# Altium PCB RFM232_V08_USB.PcbDoc
Units mm, origin at the board's own origin, x right, y up, seen from the top; angles counter-clockwise.
Board outline 90 x 32.1 mm, 2 copper layers (Top Layer, Bottom Layer), stack 1.57 mm thick; 69 components, 58 nets, 262 pads, 153 vias.
Unrouted connection lines stored in the file: 55.
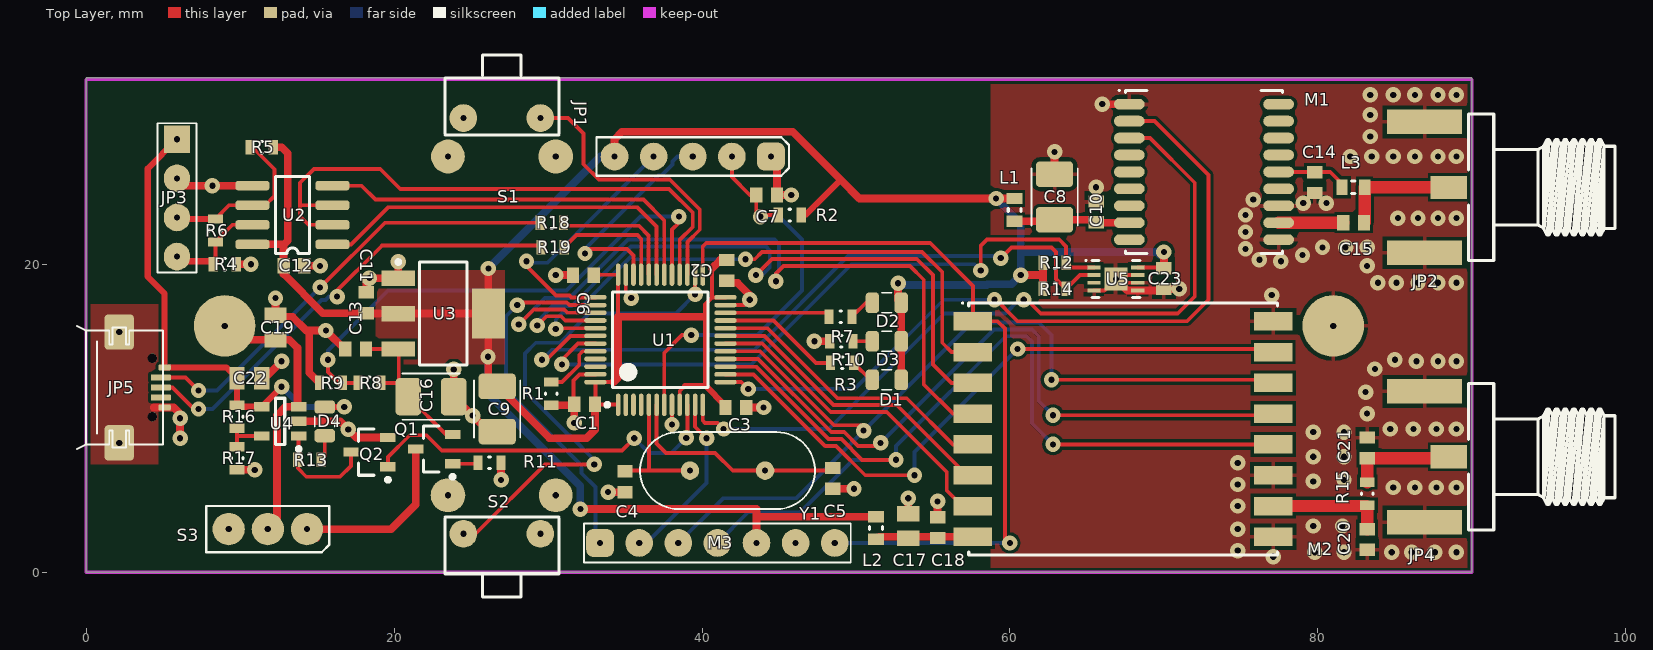
[diagram p0: Top Layer view]
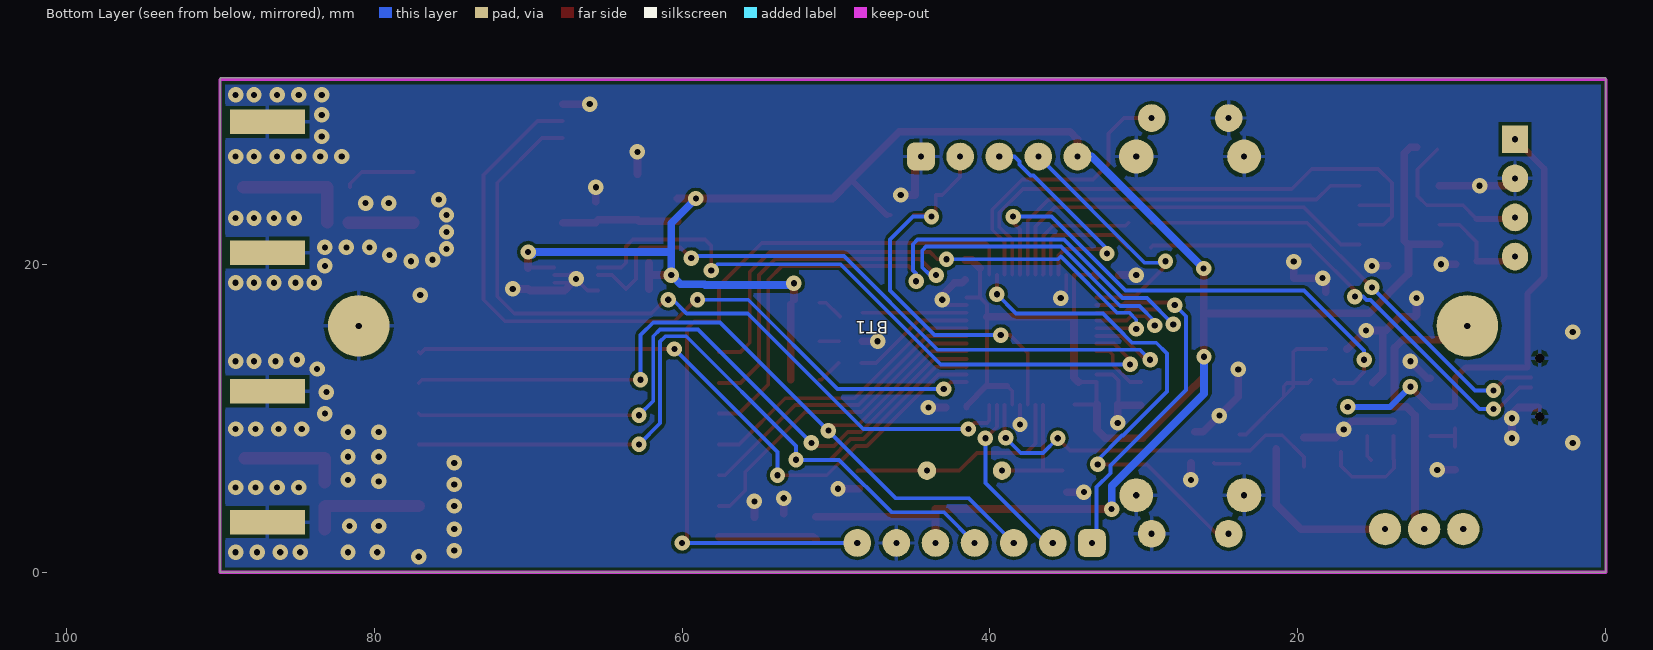
[diagram p1: Bottom Layer view, seen from below]

## Layer stack, top to bottom
Top Solder: solder mask 0.01, Solder Resist, Dk 3.5
Top Layer: signal copper 0.035
Dielectric 1: dielectric 1.5, FR-4, Dk 4.6
Bottom Layer: signal copper 0.035
Bottom Solder: solder mask 0.01, Solder Resist, Dk 3.5

## Board outline
0,0 0,32.1 90,32.1 90,0

## Design rules (kind name [scope] priority, off if disabled: settings)
Clearance Clearance_1 [InNamedPolygon('GND_T_RF') vs InNet('NetC13_2')] p1: gap=0.3 ignorepadtopadclearanceinfootprint=FALSE
Clearance [All] p2: gap=0.2 ignorepadtopadclearanceinfootprint=FALSE
ComponentClearance ComponentClearance_3 [InComponent('BT1') vs InComponent('Y2')] p1: gap=0 collisioncheckmode=3 verticalgap=0 showdistances=FALSE
ComponentClearance ComponentClearance_2 [InComponent('BT1') vs InComponent('S2')] p2: gap=0 collisioncheckmode=3 verticalgap=0 showdistances=FALSE
ComponentClearance ComponentClearance_1 [InComponent('S1') vs InComponent('BT1')] p3: gap=0 collisioncheckmode=3 verticalgap=0 showdistances=FALSE
ComponentClearance [All] p4: gap=0.15 collisioncheckmode=3 verticalgap=0.15 showdistances=FALSE
HoleSize [All] p1: absolutevalues=TRUE maxlimit=5 minlimit=0.025 maxpercent=80.000 minpercent=20.000
MinimumSolderMaskSliver [All] p1: minsoldermaskwidth=0
PolygonConnect PolygonConnect_6 [InComponent('JP5') vs IsNamedPolygon('GND_USB')] p1: connectstyle=Direct reliefconductorwidth=0.254 reliefentries=4 polygonreliefangle="90 Angle" airgapwidth=0.254
PolygonConnect PolygonConnect_5 [All vs IsNamedPolygon('VCC')] p2: connectstyle=Direct reliefconductorwidth=0.254 reliefentries=4 polygonreliefangle="90 Angle" airgapwidth=0.254
PolygonConnect PolygonConnect_4 [IsVia vs IsNamedPolygon('GND_RF')] p3: connectstyle=Direct reliefconductorwidth=0.254 reliefentries=4 polygonreliefangle="90 Angle" airgapwidth=0.254
PolygonConnect PolygonConnect_3 [IsVia vs IsNamedPolygon('GND-B')] p4: connectstyle=Direct reliefconductorwidth=0.254 reliefentries=4 polygonreliefangle="90 Angle" airgapwidth=0.254
PolygonConnect PolygonConnect_2 [InComponent('U2') vs IsNamedPolygon('3V3')] p5: connectstyle=Direct reliefconductorwidth=0.254 reliefentries=4 polygonreliefangle="90 Angle" airgapwidth=0.254
PolygonConnect PolygonConnect_1 [IsVia vs IsNamedPolygon('GND_T_RF') Or  IsNamedPolygon('GND_B1')] p6: connectstyle=Direct reliefconductorwidth=0.254 reliefentries=4 polygonreliefangle="90 Angle" airgapwidth=0.254
PolygonConnect [All] p7: connectstyle=Relief reliefconductorwidth=0.254 reliefentries=4 polygonreliefangle="90 Angle" airgapwidth=0.254
RoutingVias [All] p1: holewidth=0.711 width=1.27 viastyle="Through Hole" minholewidth=0.711 minwidth=1.27 maxholewidth=0.711 maxwidth=1.27
SilkToSilkClearance [All] p1: silktosilkclearance=0.02
SilkToSolderMaskClearance [IsPad] p1: minsilkscreentomaskgap=0.02 clearancetoexposedcopper=TRUE
SolderMaskExpansion [All] p1: expansion=0.102
Width [All] p1: maxlimit=3 minlimit=0.2 preferedwidth=0.25
25 further rules are at their usual default settings.

## Components (designator, comment, footprint, x,y, rotation, side; value= is the part's Value field where it differs from the comment)
BT1 "Battery" 18650 45,16 r0 bottom locked
C1 "100n" C-0603 32.375,10.9 r180 top
C2 "100n" C-0603 41.6,19.6 r270 top
C3 "100n" C-0603 42.2,10.7 r0 top
C4 "22p" C-0603 35,5.875 r90 top
C5 "22p" C-0603 48.5,6.1 r90 top
C6 "100n" C-0603 32.3,19.3 r180 top
C7 "nc" C-0603 44.2,24.5 r0 top
C8 "CAPP" C-TANTAL-B 62.9,24.375 r90 top
C9 "CAPP" C-TANTAL-B 26.7,10.6 r270 top
C10 "100n" C-0603 65.6,23.4 r90 top
C11 "100n" C-0603 18.2,17.5 r90 top
C12 "100n" C-0603 13.5,19.9 r0 top
C13 "100n" C-0603 17.5,14.5 r180 top
C14 "nc" C-0603 79.8,25.3 r90 top
C15 "27p" C-0603 82.325,22.7 r0 top
C16 "CAPP" C-TANTAL-B 22.4,11.4 r0 top
C17 "4u7" C-0805 53.4,3 r90 top
C18 "100n" C-0603 55.3,2.9 r90 top
C19 "4u7" C-0805 12.3,15.9 r90 top
C20 "nc" C-0603 83.2,2.125 r270 top locked
C21 "nc" C-0603 83.2,8.075 r90 top locked
C22 "4u7" C-0805 10.6,12.6 r0 top
C23 "100n" C-0603 70,19.075 r270 top
D1 "GREEN" LED_0805 52,12.5 r0 top locked
D2 "RED" LED_0805 52,17.5 r0 top locked
D3 "GREEN" LED_0805 52,15 r0 top locked
D4 "RED" LED_0805 15.5,9.8 r90 top
JP1 "Header 5" PLS1-5R 39.4,27 r180 top
JP2 "SMA" AMPHENOL_132357-11 88.5,25 r180 top locked
JP3 "HEADER 4" PLS1-4 5.9,28.12 r270 top
JP4 "SMA" AMPHENOL_132357-11 88.5,7.5 r180 top locked
JP5 "MSB-SW-5B" CU09SAM 0,12 r90 top
L1 "BLM18AG601" L-0603 60.3,23.535 r270 top
L2 "BLM18AG601" L-0603 51.3,2.865 r270 top
L3 "nc" L-0603 82.3,25 r0 top
M1 "SIM28ML" LGA18_GNSS 72.6,26 r0 top
M2 "RFM69HW" LGA16_RFM69 67.35,9.3 r0 top locked
M3 "ECMA0896-1" PLS1-7 33.38,1.9 r0 top
Q1 "IRLML6402" SOT-23 22.6,8 r180 top
Q2 "MMUN2211" SOT-23 18.4,7.8 r180 top
R1 "nc" R-0603 30.2,11.6 r90 top
R2 "nc" R-0603 45.7,23.2 r0 top
R3 "200" R-0603 49.1,13.6 r180 top
R4 "4k7" R-0603 9,20 r0 top
R5 "4k7" R-0603 11.4,27.6 r180 top
R6 "nc" R-0603 8.4,22.2 r270 top
R7 "200" R-0603 49,16.6 r180 top
R8 "100k" R-0603 18.4,12.3 r0 top
R9 "100k" R-0603 15.9,12.3 r0 top
R10 "1k" R-0603 49.05,15 r180 top
R11 "0" R-0603 26.2,7.1 r180 top
R12 "4k7" R-0603 62.9,20.1 r180 top
R13 "10k" R-0603 14.5,7.3 r180 top
R14 "4k7" R-0603 62.9,18.4 r180 top
R15 "0" R-0603 83.2,5.1 r90 top locked
R16 "nc" R-0603 9.8,10.1 r90 top
R17 "2k" R-0603 9.8,7.4 r90 top
R18 "22" R-0603 30.25,22.7 r0 top
R19 "22" R-0603 30.3,21.1 r0 top
S1 "KLS7" KLS7-TS3602 27,29.5 r180 top
S2 "KLS7" KLS7-TS3602 27,2.5 r0 top
S3 "SW-SPDT" SPDT_100mil 11.8,2.8 r180 top
U1 "STM32L151C8T6A" LQFP-48 37.3,15.1 r90 top locked
U2 "SN65HVD12DG4" SO8 13.4,23.2 r90 top
U3 "LD1117-3.3" SOT230P700X180-4N 23.2,16.8 r0 top
U4 "MCP73812" SOT-23-5 12.6,9.8 r180 top
U5 "PCT2075TP" SOT1069-2 66.88,19.05 r0 top
Y1 "8MHz" HC49_3.5mm 41.66,6.6 r180 top

## Footprints (in the part's own frame and the unit in brackets; to place one, negate y for a bottom-side part, rotate by r counter-clockwise, add the part's x,y. Pads: shape width x height; smd on the part's side, far side on the other; paste and mask are expansions set on the pad)
18650 [mm]
  round 4 hole 0.4: 1(-36,0) 2(36,0)
  body extent -37.5,-10.5 37.5,10.5, height 21
AMPHENOL_132357-11 [mm] "SMA End Launch Jack for 1.58mm PCB, 50 Ohm, Flat Tab Contact"
  rect 2.35x1.5 smd: 1(0,0)
  rect 4.9x1.6 smd: 2(1.575,4.25) 2(1.575,-4.25)
  rect 4.9x1.6 smd far side: 2(1.575,4.25) 2(1.575,-4.25)
  silkscreen extent -10.81,-4.76 -1.28,4.76, body extent -10.8,-4.76 3.48,4.76, height 4.08
C-0603 [mm] "Chip Capacitor, 2-Leads, Body 1,60x0,80mm, IPC Medium Density"
  rect 0.8x1 smd: 1(-0.675,0) 2(0.675,0)
  body extent -0.87,-0.48 0.87,0.47, height 0.85
C-0805 [mm] "Chip Capacitor, 2-Leads, Body 2,00x1,25mm, IPC Medium Density"
  rect 1x1.45 smd: 1(-0.8,0) 2(0.8,0)
  body extent -1.1,-0.72 1.1,0.72, height 1.1
C-TANTAL-B [mm] "Capacitor, Polarized, Molded Body; 3.45 mm L X 2.80 mm W X 2.10 mm H body"
  rrect30% 1.66x2.42 smd: 1(1.475,0) 2(-1.475,0)
  silkscreen extent -1.85,-1.5 1.85,1.5, body extent -1.75,-1.4 1.75,1.4, height 2.1
CU09SAM [mm]
  rrect50% 0.4x0.8 smd: 1(1.3,-5.1) 5(-1.3,-5.1)
  rrect25% 0.4x1.3 smd: 2(0.65,-4.85) 3(0,-4.85) 4(-0.65,-4.85)
  rrect25% 2.3x1.9 smd: 6(-3.6,-2.15) 6(3.6,-2.15)
  round 0.6 hole 0.6: 6(-1.9,-4.3) 6(1.9,-4.3)
  silkscreen extent -4,-5 4,0.6, body extent -3.99,-4.95 3.99,0.47, height 2.7
HC49_3.5mm [mm] "Crystal, HC-49; 4.88 mm C X 0.43 mm W 11.175 mm L X 4.75 mm T X 3.50 mm H body"
  round 1.2 hole 0.4 paste-1.06: 1(-2.44,0) 2(2.44,0)
  silkscreen extent -5.68,-2.5 5.68,2.5, body extent -5.59,-2.37 5.59,2.37, height 3.5
KLS7-TS3602 [mm] "miniature switch"
  round 1.8 hole 0.4: 1(-2.5,0) 2(2.5,0)
  oval 2.25x2.2 hole 0.4: 3(-3.5,2.5)
  round 2.2 hole 0.4: 3(3.5,2.5)
  silkscreen extent -3.7,-4.1 3.7,1.1, body extent -3.7,-3.97 3.6,3.75, height 4.4
L-0603 [mm] "Chip Inductor, 2-Leads, Body 1,60x0,80mm, IPC Medium Density"
  rect 0.74x1.02 smd: 1(-0.735,0) 2(0.735,0)
  silkscreen extent -0.1,-0.41 0.1,0.41, body extent -0.9,-0.5 0.9,0.5, height 1
LED_0805 [mm] "LED, Chip; 2.00 mm L X 1.25 mm W X 0.80 mm H body"
  rrect51% 0.86x1.35 smd: A(0.935,0) K(-0.935,0)
  silkscreen extent -0.33,-0.65 0.33,0.65, body extent -1,-0.63 1,0.63, height 0.25
LGA16_RFM69 [mm] "LGA, 16-Leads, RFM69HW"
  rect 2.5x1.2 smd: 1(-9.75,7) 2(-9.75,5) 3(-9.75,3) 4(-9.75,1) 5(-9.75,-1) 6(-9.75,-3) 7(-9.75,-5) 8(-9.75,-7) 9(9.75,-7) 10(9.75,-5) 11(9.75,-3) 12(9.75,-1) 13(9.75,1) 14(9.75,3) 15(9.75,5) 16(9.75,7)
  silkscreen extent -10.47,-8.17 10.02,8.22, body extent -9.87,-8.03 9.87,8.03, height 2
LGA18_GNSS [mm] "8-Leads, Body 10,10x9,70mm, Pitch 1,10mm"
  oval 2x0.7 smd mask+0.1: 1(-4.85,4.4) 2(-4.85,3.3) 3(-4.85,2.2) 4(-4.85,1.1) 5(-4.85,0) 6(-4.85,-1.1) 7(-4.85,-2.2) 8(-4.85,-3.3) 9(-4.85,-4.4) 10(4.85,-4.4) 11(4.85,-3.3) 12(4.85,-2.2) 13(4.85,-1.1) 14(4.85,0) 15(4.85,1.1) 16(4.85,2.2) 17(4.85,3.3) 18(4.85,4.4)
  silkscreen extent -5.55,-5.3 5.1,5.35, body extent -4.95,-5.15 4.95,5.15, height 2.6
LQFP-48 [mm] "TSQFP, 48-Leads, Body 7,00x7,00mm, Pitch 0,50mm, IPC Medium Density"
  oval 1.45x0.3 smd: 1(-4.225,2.75) 2(-4.225,2.25) 3(-4.225,1.75) 4(-4.225,1.25) 5(-4.225,0.75) 6(-4.225,0.25) 7(-4.225,-0.25) 8(-4.225,-0.75) 9(-4.225,-1.25) 10(-4.225,-1.75) 11(-4.225,-2.25) 12(-4.225,-2.75) 25(4.225,-2.75) 26(4.225,-2.25) 27(4.225,-1.75) 28(4.225,-1.25) 29(4.225,-0.75) 30(4.225,-0.25) 31(4.225,0.25) 32(4.225,0.75) 33(4.225,1.25) 34(4.225,1.75) 35(4.225,2.25) 36(4.225,2.75)
  oval 0.3x1.45 smd: 13(-2.75,-4.225) 14(-2.25,-4.225) 15(-1.75,-4.225) 16(-1.25,-4.225) 17(-0.75,-4.225) 18(-0.25,-4.225) 19(0.25,-4.225) 20(0.75,-4.225) 21(1.25,-4.225) 22(1.75,-4.225) 23(2.25,-4.225) 24(2.75,-4.225) 37(2.75,4.225) 38(2.25,4.225) 39(1.75,4.225) 40(1.25,4.225) 41(0.75,4.225) 42(0.25,4.225) 43(-0.25,4.225) 44(-0.75,4.225) 45(-1.25,4.225) 46(-1.75,4.225) 47(-2.25,4.225) 48(-2.75,4.225)
  silkscreen extent -4.35,-3.1 3.1,3.57, body extent -3.5,-3.5 3.5,3.5, height 1.6
PLS1-4 [mm] "Header, Vertical, 2.54 mm pitch; 0.70 mm lead width, 4 pins, 1 row, 4 pins per row, 8.89 mm L X 2.54 mm W X 7.54 mm H body"
  rect 1.8x1.71 hole 0.4 paste-1.71: 1(0,0)
  oval 1.8x1.71 hole 0.4 paste-1.71: 2(2.54,0) 3(5.08,0) 4(7.62,0)
  silkscreen extent -1.04,-1.27 8.66,1.27, body extent -0.64,-1.27 8.25,1.27, height 7.54
PLS1-5R [mm]
  rrect50% 1.8x1.8 hole 0.4: 1(-5.08,0)
  round 1.8 hole 0.4: 2(-2.54,0) 3(0,0) 4(2.54,0) 5(5.08,0)
  silkscreen extent -6.25,-1.25 6.25,1.25, body extent -6.35,-10.03 6.35,0.32, height 2.5
PLS1-7 [mm] "Header, Vertical, 2.54 mm pitch; 0.70 mm lead width, 7 pins, 1 row, 7 pins per row, 16.51 mm L X 2.54 mm W X 7.54 mm H body"
  rrect50% 1.8x1.8 hole 0.4 paste-1.71: 1(0,0)
  round 1.8 hole 0.4 paste-1.71: 2(2.54,0) 3(5.08,0) 4(7.62,0) 5(10.16,0) 6(12.7,0) 7(15.24,0)
  silkscreen extent -1.04,-1.27 16.28,1.27, body extent -0.64,-1.27 15.88,1.27, height 7.54
R-0603 [mm] "Chip Resistor, 2-Leads, Body 1,60x0,82mm, IPC Medium Density"
  rect 0.6x0.95 smd: 1(-0.75,0) 2(0.75,0)
  silkscreen extent -0.05,-0.38 0.05,0.38, body extent -0.85,-0.48 0.85,0.48, height 0.6
SO8 [mm] "Small Outline; 8 Leads; Body Width 3.9 mm; Pitch 1.27 mm"
  rrect50% 0.6x2.2 smd: 1(-1.905,-2.6) 2(-0.635,-2.6) 3(0.635,-2.6) 4(1.905,-2.6) 5(1.905,2.6) 6(0.635,2.6) 7(-0.635,2.6) 8(-1.905,2.6)
  silkscreen extent -2.5,-1.1 2.5,1.1, body extent -2.45,-1.95 2.45,1.95, height 1.73
SOT230P700X180-4N [mm] "SOT223, 4-Leads, Body 6,50x7,00mm (avg), Pitch 2,30mm, IPC Medium Density"
  rect 2.15x1 smd: 1(-2.925,2.3) 2(-2.925,0) 3(-2.925,-2.3)
  rect 2.15x3.25 smd: 2(2.925,0)
  silkscreen extent -3.05,-3.35 1.55,3.47, body extent -1.85,-3.35 1.85,3.35, height 1.8
SOT1069-2 [mm] "8-lead DFN 2*3mm"
  rect 0.85x0.25 smd: 1(-1.42,0.75) 2(-1.42,0.25) 3(-1.42,-0.25) 4(-1.42,-0.75) 5(1.42,-0.75) 6(1.42,-0.25) 7(1.42,0.25) 8(1.42,0.75)
  rect 1.5x1.5 smd: 9(0,0)
  silkscreen extent -2,-1.2 1.55,1.25, body extent -1.55,-1.05 1.55,1.05, height 0.8
SOT-23 [mm] "SOT23, 3-Leads, Body 2,90x2,45mm, Pitch 0,95mm, IPC Medium Density"
  rect 1x0.6 smd: 1(-1.2,0.95) 2(-1.2,-0.95) 3(1.2,0)
  silkscreen extent -1.33,-1.5 0.7,1.92, body extent -0.7,-1.5 0.7,1.5, height 1.1
SOT-23-5 [mm] "SOT23, 5-Leads, Body 2,90x2,45mm, Pitch 0,95mm, IPC Medium Density"
  rect 1x0.6 smd: 1(-1.2,0.95) 2(-1.2,0) 3(-1.2,-0.95) 4(1.2,-0.95) 5(1.2,0.95)
  silkscreen extent -1.33,-1.5 0.3,1.92, body extent -0.7,-1.5 0.7,1.5, height 1.1
SPDT_100mil [mm]
  round 2.1 hole 0.4: 1(-2.54,0) 2(0,0) 3(2.54,0)
  silkscreen extent -4,-1.5 4,1.5, body extent -4.3,-1.88 4.29,1.89, height 6.34

## Part data
BT1: "Multicell Battery", LatestRevisionDate=17-Jul-2002, LatestRevisionNote="Re-released for DXP Platform.", PackageDescription="Battery; 2 Leads", PackageReference=BAT-2, Published=24-Mar-1999, Publisher="Altium Limited"
C1 C2 C3 C4 C5 C6 C7 C10 C11 C12 C13 C14 C15 C17 C18 C19 C20 C21 C22 C23: library part CAPN
D1 D2 D3 D4: library part DLED
JP1: "Header, 5-Pin", LatestRevisionDate=17-Jul-2002, LatestRevisionNote="Re-released for DXP Platform.", Publisher="Altium Limited"
JP2 JP4: library part X-004, "RF Connector"
JP3: "4 Pin Header"
L1 L2: library part SUPRESOR
L3: library part L
M2: library part RFM69HW_V13_2
M3: library part ECMA0896
R1 R2 R3 R4 R5 R6 R7 R8 R9 R10 R11 R12 R13 R14 R15 R16 R17 R18 R19: library part RES
S1 S2: library part SW-1, Вид=Кнопка, Корпус==Footprint, Тип=KLS7
S3: "SPDT Subminiature Toggle Switch, Right Angle Mounting, Vertical Actuation", ComponentLink1Description="Manufacturer Link", ComponentLink1URL=http://www.apem.com, DatasheetVersion=05-Dec-2000, LatestRevisionDate=17-Dec-2003, LatestRevisionNote="Schematic revised, PCB Footprint replaced.", PackageDescription="Switch; 4 Leads", PackageReference=TL36WW15050, Published=24-Mar-1999, Publisher="Altium Limited"
U1: library part STM32L151C8T6
U3: library part LM1117_3.3, Вид=Мікросхема, Корпус==Footprint, Тип=LD1117-3.3
U5: library part TMP75, Part Field 1=NXP, Part Field 6="I2C Digital temperature sensor"
Y1: library part XTAL, "Crystal Oscillator", LatestRevisionDate=17-Jul-2002, LatestRevisionNote="Re-released for DXP Platform.", PackageDescription="Crystal, Thru-Hole; 2 Leads; Body 3.1 x 8.2 mm (Dia.xH)", PackageReference=R38, Published=8-Jun-2000, Publisher="Altium Limited"

## Via types
v1: diameter 1, hole 0.4, Top Layer to Bottom Layer, 153 vias

## Nets (pads, with @x,y where several pads share a name; then routed paths per layer and width w, separated by ;. In a path a pad name is that pad's centre, name@x,y a point inside that pad or via, vN(x,y) a via of type N, cw(c..) or ccw(c..) an arc to the next point about the centre after c; other vN are vias at no path point)
+4V5: C13.1 C16.2 Q1.2 R8.2 U3.3 | length 11.9
  Top Layer w0.25: C13.1 20.1,14.5 20.3,14.3 20.3,12.025 C16.2 ; R8.2@19.15,12.5 19.35,12.3 20.7,12.3 20.925,12.075 C16.2 ; Q1.2 23.375,8.95 C16.2
A0: M3.1 U1.38 | length 23.7
  Top Layer w0.25: v1@27.8,17.35 27.975,17.525 31.215,17.525 31.39,17.35 U1.38
  Bottom Layer w0.25: v1(28,17.35) 27.275,16.625 27.275,11.825 32.175,6.925 32.175,6.425 33.075,5.525 33.075,2.205 M3.1
BATT_DET: R8.1 R9.2 U1.29 | length 34.1
  Top Layer w0.25: v1(15.7,13.8) 15.7,13 16.4,12.3 R9.2 17.45,12.3 R8.1@17.65,12.5 ; U1.29 38.05,22.25 38.5,22.7 v1(38.5,23.1)
  Bottom Layer w0.25: v1(15.7,13.8) 15.7,14.4 19.6,18.3 31.2,18.3 36,23.1 v1(38.5,23.1)
CHG_OFF: Q2.1 U1.10 | length 24.5
  Top Layer w0.25: Q2.1 19.6,7.485 21.015,8.9 22.1,8.9 23.1,7.9 34.8,7.9 v1(35.6,8.7) ; v1(38.975,8.725) 39.05,8.65 U1.10 U1.10@39.075,10.85
  Bottom Layer w0.25: v1(35.6,8.7) 36.55,7.75 38,7.75 v1(38.975,8.725)
CS_LCD: M3.2 U1.11 | length 11.4
  Top Layer w0.25: U1.11 39.55,9.45 v1(40.3,8.7)
  Bottom Layer w0.25: M3.2 36.4,1.9 40.3,5.8 v1(40.3,8.7)
CS_RFM: M2.15 U1.14 | length 42.7
  Top Layer w0.25: U1.14 43.35,12.85 48,8.2 48.7,8.2 50.6,6.3 v1(53.8,6.3) ; v1(60.5,14.5) 76.7,14.5 77,14.2 M2.15
  Bottom Layer w0.25: v1(53.8,6.3) 53.8,7.8 v1(60.5,14.5)
DE: U1.28 U2.2 U2.3 | length 38.1
  Top Layer w0.25: U2.2 14.435,22.565 13.9,23.1 13.9,23.8 ; U2.3 13.935,23.835 13.9,23.8 ; U1.28 38.55,21.583 39.4,22.433 39.4,23.367 37.867,24.9 20.4,24.9 19.1,26.2 14.8,26.2 13.9,25.3 13.9,23.8
DIO0: M2.2 U1.41 | length 38
  Top Layer w0.25: v1(30.5,15.8) v1@30.55,15.85 ; v1@30.5,15.85 v1@30.55,15.85 ; v1@30.83,16 30.7,16 v1@30.55,15.85 ; U1.41 v1@30.55,15.85 ; v1(42.828,20.325) 43.425,20.325 43.9,20.8 54.3,20.8 55.6,19.5 55.6,14.9 56.2,14.3 M2.2
  Bottom Layer w0.25: v1(30.5,15.8) 30.5,16.4 30.95,16.85 31.75,16.85 35.4,20.5 35.575,20.325 v1(42.828,20.325)
DIO1: M2.3 U1.40 | length 45.1
  Top Layer w0.25: v1(29.3,16.025) 29.9,16.625 30.842,16.625 31.117,16.35 U1.40 ; v1(43.5,19.3) 44.55,20.35 53.95,20.35 55,19.3 55,13.5 56.2,12.3 M2.3
  Bottom Layer w0.25: v1(29.3,16.025) 29.3,16.3 30.3,17.3 31.536,17.3 35.386,21.15 44.15,21.15 44.4,20.9 44.4,19.8 43.9,19.3 v1(43.5,19.3)
DIO2: M2.4 U1.39 | length 48.7
  Top Layer w0.25: v1(28.1,16.1) 29.075,17.075 31.028,17.075 31.253,16.85 U1.39 ; v1(44.8,18.9) 44.8,19.4 45.3,19.9 53.5,19.9 54.4,19 54.4,12.2 56.3,10.3 M2.4
  Bottom Layer w0.25: v1(28.1,16.1) 29.8,17.8 31.4,17.8 35.2,21.6 44.7,21.6 45,21.3 45,19.6 44.8,19.4 v1(44.8,18.9)
DIO3: M2.5 U1.20 | length 19.2
  Top Layer w0.25: U1.20 44.25,15.85 48.8,11.3 53.3,11.3 56.3,8.3 M2.5
DIO4: M2.6 U1.19 | length 19.8
  Top Layer w0.25: U1.19 44.05,15.35 48.55,10.85 52.65,10.85 57.2,6.3 M2.6
DIO5: M2.7 U1.18 | length 21.1
  Top Layer w0.25: U1.18 43.914,14.85 48.364,10.4 52,10.4 55.9,6.5 55.9,5.3 56.9,4.3 M2.7
GND: BT1.2 C1.2 C2.2 C3.2 C4.1 C5.1 C6.2 C7.2 C8.1 C9.1 C10.2 C11.2 C12.2 C13.2 C14.1 C16.1 C17.2 C18.2 C19.2 C20.2 C21.2 C22.2 C23.2 JP1.1 JP2.2 JP3.2 JP4.2 JP5.5 JP5.6 M1.1 M1.10 M1.12 M2.9 M2.11 M2.16 M3.6 Q2.2 R1.1 R4.2 R9.1 R10.2 R11.1 R17.1 S1.2 S1.3 S2.2 S2.3 U1.8 U1.23 U1.35 U1.47 U2.5 U3.1 U4.2 U5.4 U5.5 U5.6 U5.7 U5.9 | length 76.9
  Top Layer w0.25: C1.2@31.65,10.85 31.65,12.447 32.053,12.85 U1.47 ; U1.35 35.05,18.25 v1@35.4,17.9 ; v1(38.05,9.598) U1.8 ; U1.23 42.75,17.35 v1(43.1,17.7) ; U5.4 66.13,18.3 v1(66.88,19.05) ; U5.9@67.13,18.8 U5.6 ; U5.9@67.13,19.3 U5.7
  Top Layer w0.5: 4.4,10.7 5.7,10.7 6.1,10.3 v1(6.1,8.7) ; JP3.2 6.375,25.105 U2.5 ; R4.2 v1(10.7,20) ; R17.1 v1(10.95,6.65) ; C22.2 11.6,12.6 v1(12.7,13.7) ; v1(12.3,17.8) C19.2 12.4,16.6 13.4,16.6 14.3,15.7 ; U4.2 16.5,9.8 17.55,8.75 Q2.2 ; C12.2 v1(15.2,19.9) ; R9.1 14.5,12.95 14.5,15.7 v1(15.575,15.7) 16.8,14.475 C13.2 ; C11.2 18.2,19.1 v1(18.4,19.1) U3.1 v1(20.275,20.175) ; v1(23.875,13.175) C16.1 26.15,9.125 C9.1 ; v1(26.95,6) R11.1 ; R1.1 31.65,10.85 C1.2 v1(31.7,9.7) ; v1(30.5,19.3) C6.2 ; v1(33.9,5.2) C4.1 ; v1(35.4,17.8) v1@35.4,17.9 ; C2.2@41.6,19 41.8,18.8 42.3,18.8 43.1,18 v1(43.1,17.7) ; C3.2 v1(44,10.7) ; JP1.1 44.875,26.605 C7.2 v1(45.8,24.5) ; v1(47.3,15) R10.2 ; C5.1 v1(49.875,5.425) ; C17.2 v1@53.4,4.6 ; C18.2 v1@55.3,4.4 ; C8.1 v1@62.9,27 ; C10.2 v1(65.6,25) ; v1(66,30.4) M1.1 ; U5.9@67.13,19.3 v1(66.88,19.05) 67.13,18.8 67.63,18.3 U5.5 69.9,18.3 C23.2 v1(71,18.4)
  other v1: 77.1,1 79.8,1.3 81.7,1.3 84.8,1.3 86.1,1.3 87.6,1.3 89,1.3 74.8,1.4 74.8,2.8 79.7,3 81.6,3 74.8,4.3 55.3,4.6 53.4,4.8 84.9,5.5 86.3,5.5 87.7,5.5 89,5.5 74.8,5.7 79.7,5.9 81.7,6 74.8,7.1 79.7,7.5 81.7,7.5 2.15,8.4 79.7,9.1 81.7,9.1 17.025,9.275 84.7,9.3 86.2,9.3 87.7,9.3 89,9.3 6.1,10 25.1,10.175 83.2,10.3 83.1,11.7 83.7,13.2 86.4,13.7 87.8,13.7 89,13.7 85,13.8 2.15,15.6 77,18 83.9,18.8 85.1,18.8 86.5,18.8 87.8,18.8 89,18.8 83.2,19.9 77.6,20.2 76.2,20.3 79,20.6 75.3,21 80.3,21.1 81.8,21.1 83.2,21.1 75.3,22.1 85.2,23 86.5,23 87.8,23 89,23 75.3,23.2 79.046,23.971 80.554,23.971 75.8,24.2 8.2,25.105 82.1,27 83.5,27 84.9,27 86.3,27 87.8,27 89,27 62.9,27.3 83.4,28.3 83.4,29.7 83.4,31 84.9,31 86.3,31 87.8,31 89,31
GREEN: R3.2 U1.21 | length 8
  Top Layer w0.25: U1.21 44.65,16.35 47.4,13.6 R3.2
K0: S2.1 U1.26 | length 33.4
  Top Layer w0.25: S2.1 25.3,2.5 29.8,7 v1(33,7) ; v1(39.55,18.05) U1.26
  Bottom Layer w0.25: v1(33,7) 33,7.3 31.425,8.875 31.358,8.875 28.5,11.733 28.5,14.2 29.2,14.9 30.767,14.9 31.325,15.458 31.325,15.461 32.664,16.8 38.3,16.8 v1(39.55,18.05)
K1: S1.1 U1.27 | length 18.5
  Top Layer w0.25: S1.1 31.3,29.5 32.3,28.5 32.3,26.5 33.3,25.5 37.903,25.5 39.85,23.553 39.85,22.247 39.05,21.447 U1.27
MISO: M2.13 U1.16 | length 45.7
  Top Layer w0.25: U1.16 43.641,13.85 48.391,9.1 49.236,9.1 50.136,8.2 51.4,8.2 v1(51.6,8.4) ; v1(62.8,10.2) 77,10.2 M2.13
  Bottom Layer w0.25: v1@51.7,8.5 58.975,15.775 61.425,15.775 61.875,15.325 61.875,11.125 v1(62.8,10.2)
MOSI: M2.14 M3.3 U1.17 | length 59.2
  Top Layer w0.25: U1.17 43.777,14.35 48.577,9.55 v1@50.45,9.55 ; v1(62.7,12.5) 76.9,12.5 M2.14
  Bottom Layer w0.25: M3.3 41.36,4.8 46.1,4.8 57.525,16.225 61.875,16.225 62.7,15.4 62.7,12.75 62.45,12.5 v1(62.7,12.5)
  other v1: 50.5,9.2
NetBT1_1: BT1.1 C19.1 S3.2 U4.3 | length 18.4
  Top Layer w0.5: BT1.1 9.9,15.1 C19.1 13.2,15.1 13.725,14.575 13.725,10.825 U4.3 12.95,10.75 12.4,10.2 12.4,3.4 S3.2
NetC4_2: C4.2 U1.5 Y1.2 | length 8.2
  Top Layer w0.25: C4.2@35.3,6.6 36.5,6.6 ; U1.5 36.55,6.65 36.5,6.6 ; Y1.2 36.5,6.6
NetC5_2: C5.2 U1.6 Y1.1 | length 14.8
  Top Layer w0.25: U1.6 37.05,8.35 37.65,7.75 40.85,7.75 42,6.6 Y1.1 48.575,6.6 C5.2@48.6,6.575
NetC8_2: C8.2 C10.1 L1.2 M1.8 | length 7.6
  Top Layer w0.5: L1.2 62.8,22.8 C8.2 65.425,22.9 C10.1 65.625,22.7 M1.8
NetC14_2: C14.2 L3.1 M1.14 | length 4.7
  Top Layer w0.25: M1.14 80.8,26 81.565,25.235 L3.1
NetC15_1: C15.1 M1.11 | length 4.2
  Top Layer w0.8: M1.11 C15.1
NetC15_2: C15.2 JP2.1 L3.2 | length 7.8
  Top Layer w0.25: C15.2 C15.2@83.035,22.735
  Top Layer w0.8: C15.2@83.035,22.735 L3.2 JP2.1
NetC17_1: C17.1 C18.1 L2.2 M2.8 | length 6.4
  Top Layer w0.5: L2.2 51.47,2.3 M2.8
NetC20_1: C20.1 M2.10 R15.1 | length 7.6
  Top Layer w0.25: R15.1@83.15,4.3 R15.1@83.2,4.25
  Top Layer w0.8: M2.10 R15.1@83.15,4.3 ; C20.1 R15.1@83.2,4.25
NetC21_1: C21.1 JP4.1 R15.2 | length 6.9
  Top Layer w0.25: JP4.1@88.4,7.4 JP4.1
  Top Layer w0.8: R15.2 C21.1 JP4.1@88.4,7.4
NetD1_K: D1.K R3.1 | length 1.7
  Top Layer w0.25: R3.1 50.95,12.5 D1.K
NetD2_K: D2.K R7.1 | length 1.7
  Top Layer w0.25: R7.1 50.65,17.5 D2.K
NetD3_K: D3.K R10.1 | length 1.3
  Top Layer w0.25: R10.1 D3.K
NetD4_K: D4.K R13.1 | length 1.7
  Top Layer w0.25: R13.1 15.5,7.55 D4.K
NetJP3_3: JP3.3 R5.2 R6.1 U2.6 | length 10.5
  Top Layer w0.25: JP3.3 JP3.3@5.99,22.95 ; R6.1 9.285,23.835 U2.6 11.635,23.835 12.225,24.425 12.225,26.175 10.95,27.45
  Top Layer w0.4: JP3.3@5.99,22.95 R6.1
NetJP3_4: JP3.4 R4.1 R6.2 U2.7 | length 6.7
  Top Layer w0.25: JP3.4 JP3.4@6.2,20.2 ; R4.1@8.4,20.2 R6.2 9.515,22.565 U2.7
  Top Layer w0.4: JP3.4@6.2,20.2 R4.1@8.4,20.2
NetJP5_2: JP5.2 R18.1 | length 29.5
  Top Layer w0.25: JP5.2 6.45,12.65 v1(7.3,11.8) ; v1(15.2,18.5) 19.4,22.7 R18.1
  Bottom Layer w0.25: v1(7.3,11.8) 8.5,11.8 v1(15.2,18.5)
NetJP5_3: JP5.3 R19.1 | length 30.1
  Top Layer w0.25: JP5.3 5.6,12 7,10.6 v1(7.3,10.6) ; v1(16.3,17.9) 16.1,18.1 19.1,21.1 19.225,21.225 29.425,21.225 R19.1
  Bottom Layer w0.25: v1(7.3,10.6) 8.2,10.6 15.275,17.675 15.542,17.675 15.767,17.9 v1(16.3,17.9)
NetQ1_1: Q1.1 R11.2 | length 1.7
  Top Layer w0.25: Q1.1 25.4,7.05 R11.2
NetQ1_3: Q1.3 S3.1 | length 12.2
  Top Layer w0.5: S3.1@14.94,2.2 S3.1 19.8,2.8 21.4,4.4 Q1.3
NetQ2_3: Q2.3 R13.2 U4.1 | length 7
  Top Layer w0.25: U4.1 13.8,7.35 R13.2 13.75,6.75 14.3,6.2 16.5,6.2 17.2,6.9 Q2.3
NetR1_2: R1.2 U1.44 | length 4.1
  Top Layer w0.25: R1.2 30.917,12.35 32.025,13.458 32.025,14.125 32.25,14.35 U1.44
NetR16_1: R16.1 R17.2 U4.5 | length 2.8
  Top Layer w0.25: R17.2 9.8,8.8 ; R16.1 9.8,8.8 ; U4.5 9.85,8.85 9.8,8.8
NRST: C7.1 JP1.2 R2.1 U1.7 | length 26.7
  Top Layer w0.25: U1.7 37.55,14.25 38.7,15.4 v1(39.3,15.4) ; JP1.2 41.94,25.66 43.1,24.5 C7.1 43.525,23.375 v1(43.8,23.1) 43.9,23.2 R2.1
  Bottom Layer w0.25: v1(39.3,15.4) 43.6,15.4 46.5,18.3 46.5,21.6 45,23.1 v1(43.8,23.1)
RED: R7.2 U1.22 | length 6.8
  Top Layer w0.25: U1.22 R7.2@48.3,16.85
RFRST: M2.1 M3.7 U1.25 | length 50.6
  Top Layer w0.25: U1.25 40.05,21.15 40.275,21.375 54.825,21.375 57.6,18.6 M2.1 59.2,16.3 59.675,15.825 59.675,2.225 v1(60,1.9)
  Bottom Layer w0.25: M3.7 v1(60,1.9)
RXD1: U1.31 U2.1 | length 25.7
  Top Layer w0.25: U2.1 17.195,21.295 19.6,23.7 35.8,23.7 37.05,22.45 U1.31
RXD2: M1.2 U1.13 | length 50
  Top Layer w0.25: U1.13 42.55,12.35 v1(43,11.9) ; v1@58.9,17.9 60.5,16.3 71.5,16.3 72.9,17.7 72.9,25.8 69.4,29.3 M1.2
  Bottom Layer w0.25: v1(43,11.9) 49.9,11.9 55.7,17.7 v1(59,17.7)
SCK: M2.12 M3.4 U1.15 | length 61.8
  Top Layer w0.25: U1.15@41.55,13.325 U1.15 43.504,13.35 48.204,8.65 49.05,8.65 50.4,7.3 v1(52.6,7.3) ; v1(62.8,8.3) M2.12
  Bottom Layer w0.25: M3.4 43,3.9 46.4,3.9 49.8,7.3 v1(52.6,7.3) 52.6,8.2 59.725,15.325 61.075,15.325 61.425,14.975 61.425,9.675 v1(62.8,8.3)
SCL: R14.1 U1.42 U5.2 | length 45.2
  Top Layer w0.25: v1@29.9,13.8 31.45,15.35 U1.42 U1.42@33.05,15.325 ; v1(59.4,20.4) 60.1,21.1 62.7,21.1 63,20.8 63,19.05 R14.1 64.55,19.3 U5.2
  Bottom Layer w0.25: v1(29.6,13.8) 30.25,14.45 43.399,14.45 49.48,20.531 59.219,20.531 v1@59.3,20.45
SDA: R12.1 U1.43 U5.1 | length 43.3
  Top Layer w0.25: v1(30.9,13.5) 30.9,13.6 30.8,13.7 31.95,14.85 U1.43 ; v1(58.1,19.6) 58.1,21.2 58.5,21.6 63.2,21.6 63.65,21.15 R12.1 63.95,19.8 U5.1
  Bottom Layer w0.25: v1(30.9,13.5) 42.3,13.5 43.2,13.5 49.7,20 57.7,20 v1@57.9,19.8
SWCLK: JP1.4 U1.37 | length 17.1
  Top Layer w0.25: v1(28.6,20.2) 28.6,19.9 30.525,17.975 31.401,17.975 31.526,17.85 U1.37
  Bottom Layer w0.25: v1(28.6,20.2) 28.6,19.94 28.76,20.1 29.96,20.1 JP1.4
SWDIO: JP1.3 U1.34 | length 14.6
  Top Layer w0.25: v1(32.4,20.7) 32.7,21 35.127,21 35.55,20.577 U1.34
  Bottom Layer w0.25: v1(32.4,20.7) 32.4,21 37.175,25.775 37.367,25.775 38.085,26.493 38.085,26.685 38.4,27 JP1.3
TXD1: U1.30 U2.4 | length 26
  Top Layer w0.25: U2.4 17.895,25.105 18.8,24.2 36.2,24.2 37.55,22.85 U1.30
TXD2: M1.3 U1.12 | length 50.5
  Top Layer w0.25: U1.12 40.05,9.85 40.2,9.7 41,9.7 v1(41.4,9.3) ; v1@60.8,18 62,16.8 70.9,16.8 72,17.9 72,25.3 69.1,28.2 M1.3
  Bottom Layer w0.25: v1@41.5,9.3 48.235,9.3 55.735,16.8 59.7,16.8 60.6,17.7 v1(60.9,17.7)
USB_DM: R18.2 U1.32 | length 8.4
  Top Layer w0.25: R18.2 31.2,22.5 35.9,22.5 36.525,21.875 36.525,19.35 U1.32
USB_DP: R19.2 U1.33 | length 7.8
  Top Layer w0.25: R19.2 31.85,21.9 35.8,21.9 36.05,21.65 U1.33
V_BUS: C22.1 D4.A JP3.1 JP5.1 R16.2 U4.4 | length 32.2
  Top Layer w0.4: JP3.1 4,26.22 4,19.2 5.1,18.1 JP5.1 9.1,13.3 C22.1 R16.2 9.9,10.75 U4.4 v1(12.7,12.05) ; D4.A v1(16.765,10.735)
  Bottom Layer w0.4: v1(12.7,12.05) 14.015,10.735 v1(16.765,10.735)
VCC: C1.1 C2.1 C3.1 C6.1 C9.2 C11.1 C12.1 C23.1 D1.A D2.A D3.A JP1.5 L1.1 L2.1 M3.5 R2.2 R5.1 R12.2 R14.2 U1.1 U1.9 U1.24 U1.36 U1.48 U2.8 U3.2 U5.8 | length 190.5
  Top Layer w0.25: C1.1 U1.1@34.525,10.9 ; C1.1@33.075,10.925 U1.48 34.25,12.35 ; C6.1@33.2,19.325 U1.36 34.55,16.6 ; U1.9 38.55,11.75 38.9,12.1 ; 40.2,12.149 40.2,17.4 40.65,17.85 ; 40.65,19.75 40.65,17.85 ; U1.24 40.65,17.85 ; R2.2 R2.2@46.7,23.2 ; D2.A@52.735,17.7 D2.A ; U5.8 C23.1@69.95,19.8
  Top Layer w0.4: 38.9,12.1 40.2,12.1 ; 40.2,12.149 41.525,10.824 C3.1 ; R2.2@46.7,23.2 49,25.5
  Top Layer w0.5: U2.8 12.795,21.295 ; R5.1@12.3,27.6 12.7,27.6 13.1,27.2 13.1,21.54 12.825,21.265 C12.1 12.825,19.375 15.375,16.825 C11.1 18.225,16.8 20.275,16.8 U3.2@26.125,16.8 ; v1(26.125,19.725) U3.2@26.125,16.8 ; v1(32.1,4.1) 43.54,4.1 M3.5 43.54,3.6 L2.1 ; C1.1@33.075,10.925 C1.1 33.05,9.25 32.5,8.7 30.1,8.7 26.725,12.075 C9.2 26.125,12.65 U3.2@26.125,16.8 ; C6.1@33.1,19.225 C6.1@33.2,19.325 ; 34.25,12.35 34.55,12.65 34.55,16.6 40.2,16.6 ; JP1.5 34.32,28.12 34.8,28.6 45.9,28.6 49,25.5 50.23,24.27 v1(59.1,24.27) L1.1 ; 40.65,19.75 41.175,20.275 C2.1 ; D2.A@52.735,17.7 v1(52.735,18.765) ; D1.A D3.A D2.A@52.935,17.4 ; v1(60.7,19.3) 62.15,19.3 ; R14.2 62.15,19.3 ; R12.2 62.15,19.3 ; C23.1@69.95,19.8 C23.1 v1(70,20.8)
  Bottom Layer w0.5: v1(26.1,14) 26.1,11.6 32.1,5.6 v1(32.1,4.1) ; v1(26.125,19.725) 33.4,27 JP1.5 ; v1(52.735,18.765) 52.735,18.65 58.493,18.65 58.543,18.7 60.1,18.7 v1@60.55,19.15 ; v1(59.1,24.27) 60.7,22.67 v1(60.7,19.3) ; 60.7,20.8 v1(70,20.8) 69.896,20.8 v1@69.714,20.617
pads on no net: JP5.4 M1.4 M1.5 M1.6 M1.7 M1.9 M1.13 M1.15 M1.16 M1.17 M1.18 S3.3 U1.2 U1.3 U1.4 U1.45 U1.46 U5.3

## Polygon pours and split planes (outlines as drawn)
GND on Bottom Layer "GND-B" (solid, remove dead copper, pour order 6): 0,0 90,0 90,32 89.8,31.8 0.1,31.8
GND on Top Layer "GND_USB" (solid, remove dead copper, pour order 11): 0,17.4 4.7,17.4 4.7,7 0,7
VCC on Top Layer "VCC" (solid, remove dead copper, pour order 10): 18.8,19.6 18.8,13.5 27.2,13.5 27.2,19.6
GND on Top Layer "GND_RF" (solid, remove dead copper, pour order 8): 58.766,31.966 58.766,-0.034 89.966,-0.034 89.966,31.966

## Keep-outs
Keep-Out Layer:
  lines w0.2: 0,0 90,0 90,32 0,32 0,0